# Altium PCB FMC-320U-A1.PcbDoc (part 2 of 2)
Units mm, origin at the board's own origin, x right, y up, seen from the top; angles counter-clockwise.
Board outline 106 x 84 mm, 2 copper layers (Top Layer, Bottom Layer), stack 1.672 mm thick; 77 components, 125 nets, 413 pads, 171 vias.
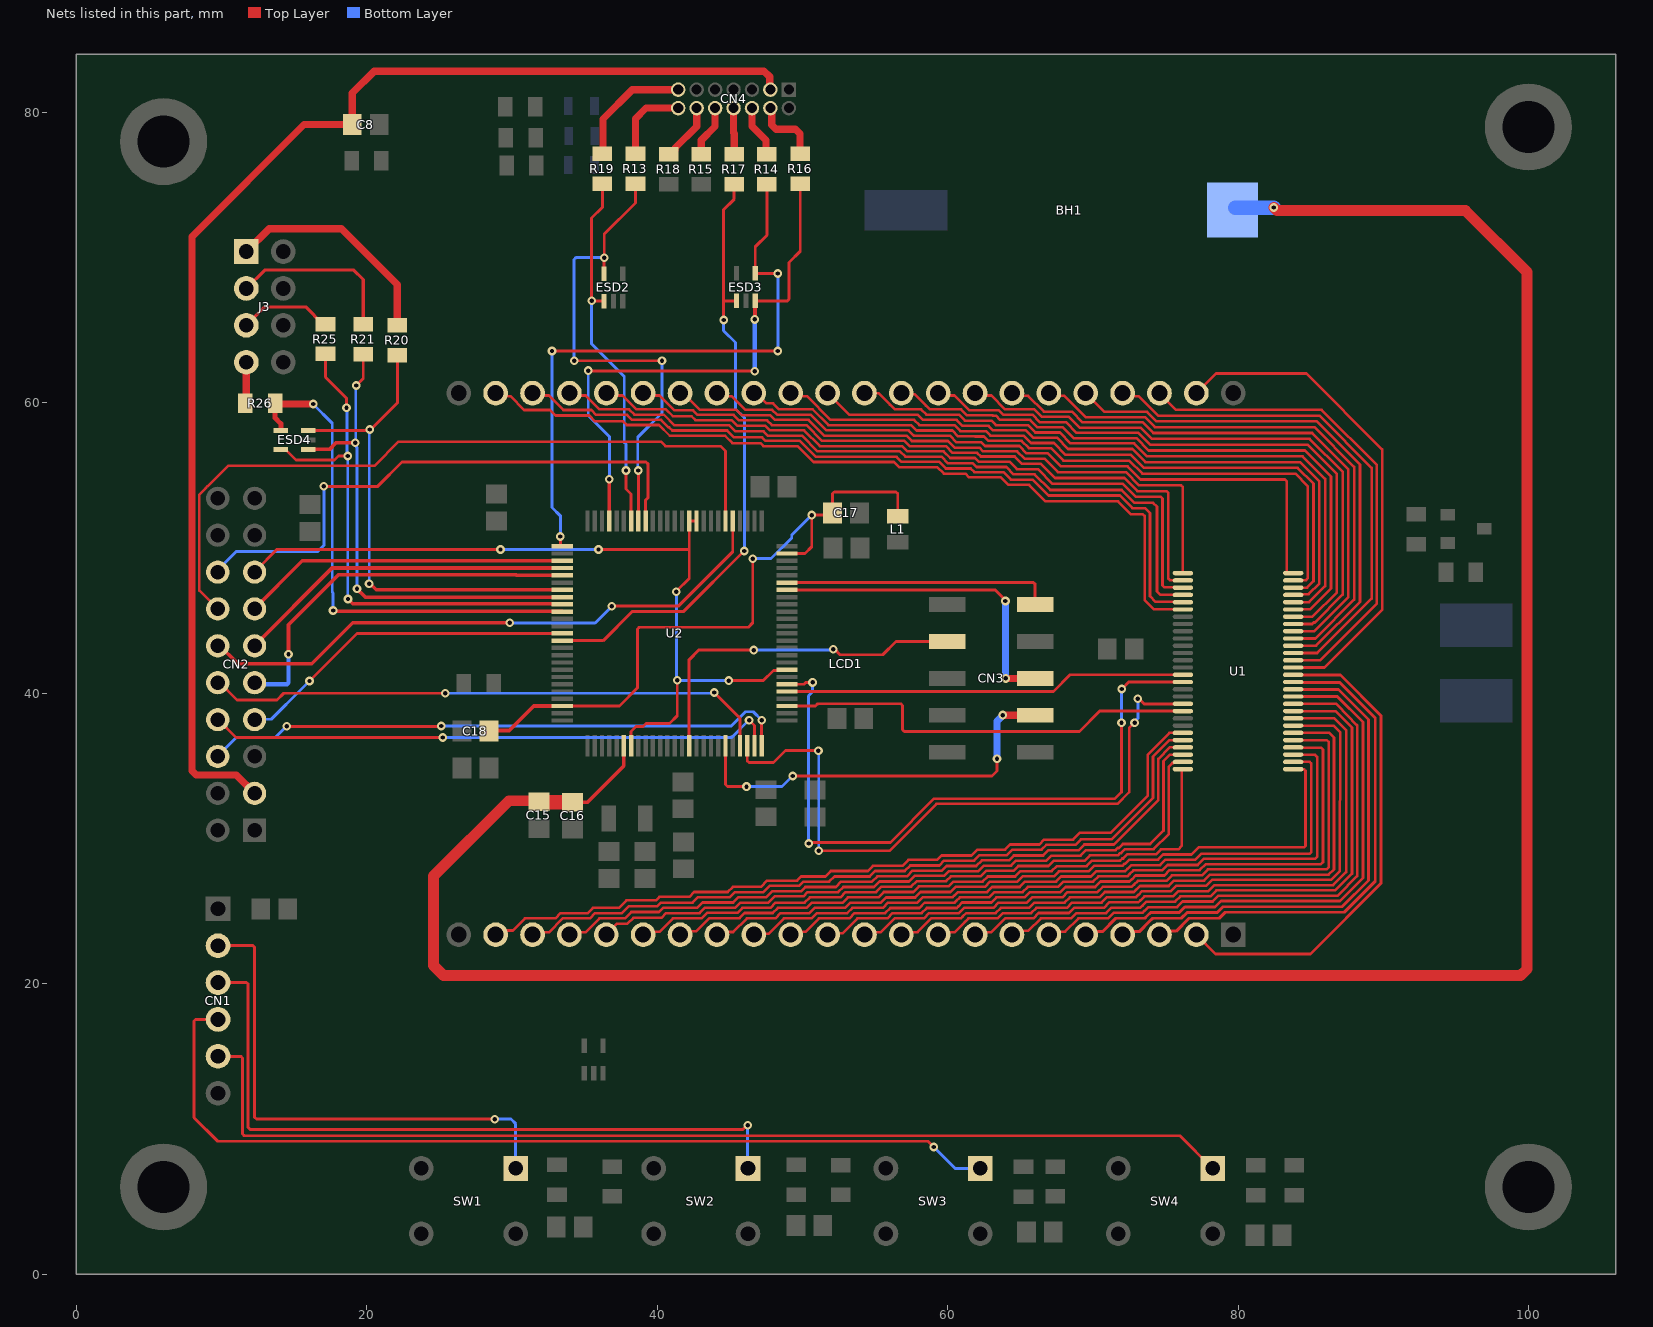
[diagram p2: the nets of this part, all layers, seen from the top]

## Via types
v1: diameter 0.6, hole 0.3, Top Layer to Bottom Layer, 166 vias
v2: diameter 0.6, hole 0.3, Top Layer to Bottom Layer, tented both sides, 3 vias
v3: diameter 1.27, hole 0.711, Top Layer to Bottom Layer, 2 vias

## Nets (pads, with @x,y where several pads share a name; then routed paths per layer and width w, separated by ;. In a path a pad name is that pad's centre, name@x,y a point inside that pad or via, vN(x,y) a via of type N, cw(c..) or ccw(c..) an arc to the next point about the centre after c; other vN are vias at no path point) (continued)
PA0: CN2.10 U2.22 | length 39.4
  Top Layer w0.2: CN2.10@9.73,40.883 11.063,39.55 13.814,39.55 14.271,40.007 v1(25.396,40.007) ; v1(43.925,40.053) 45.7,38.278 U2.22@45.7,36.39
  Bottom Layer w0.2: v1(25.396,40.007) 43.88,40.007 v1(43.925,40.053)
PA8: CN2.16 U2.67 | length 39.1
  Top Layer w0.2: v1(17.04,54.257) 20.756,54.257 22.43,55.93 39.233,55.93 39.35,55.813 39.35,53.453 39.2,53.303 U2.67@39.2,51.866
  Bottom Layer w0.2: CN2.16@9.73,48.503 11.005,49.778 16.618,49.778 17.04,50.2 v1(17.04,54.257)
PAD_DOWN: CN1.5 SW4.1 | length 74.8
  Top Layer w0.2: CN1.5@9.75,15 11.328,15 11.445,14.883 11.445,9.647 11.562,9.53 75.998,9.53 SW4.1@78.25,7.278
PAD_ENTER: CN1.3 SW2.1 | length 49.5
  Top Layer w0.2: CN1.3@9.75,20.08 11.708,20.08 11.825,19.963 11.825,10.09 11.942,9.973 45.908,9.973 46.187,10.253 v1(46.225,10.253)
  Bottom Layer w0.2: v1(46.225,10.253) 46.225,7.303 SW2.1@46.25,7.278
PAD_ESC: CN1.2 SW1.1 | length 35.5
  Top Layer w0.2: CN1.2@9.75,22.62 12.158,22.62 12.275,22.503 12.275,10.792 12.392,10.675 v1(28.8,10.675)
  Bottom Layer w0.2: v1(28.8,10.675) 29.925,10.675 30.25,10.35 SW1.1@30.25,7.278
PAD_UP: CN1.4 SW3.1 | length 63.9
  Top Layer w0.2: CN1.4@9.75,17.54 8.217,17.54 8.1,17.423 8.1,10.775 9.725,9.15 58.653,9.15 v1(59.05,8.753)
  Bottom Layer w0.2: v1(59.05,8.753) 60.525,7.278 SW3.1@62.25,7.278
PB10: CN3.5 U2.44 | length 23
  Top Layer w0.2: U2.44@48.938,47.128 63.259,47.128 63.979,46.408 v1(63.979,46.357) ; CN3.5@65.464,41.028 65.664,41.228 65.944,40.947 CN3.5@66.025,41.028
  Top Layer w0.5: v1(64,41.028) CN3.5@65.464,41.028
  Bottom Layer w0.2: v1@63.979,41.049 v1(64,41.028)
  Bottom Layer w0.5: v1@63.979,41.049 v1(63.979,46.357)
PB11: CN3.9 U2.45 | length 18.5
  Top Layer w0.22: U2.45@48.938,47.628 56.605,47.628 56.613,47.635 65.908,47.635 66.025,47.517 CN3.9@66.025,46.108
PCF8553_CE: U1.20 U2.28 | length 29.7
  Top Layer w0.2: U2.28@48.938,39.128 50.9,39.128 51.055,39.283 56.783,39.283 56.9,39.165 56.9,37.495 57.017,37.378 69.075,37.378 70.475,38.778 U1.20@76.2,38.778
PCF8553_RESET: U1.15 U2.30 | length 27.7
  Top Layer w0.2: U2.30@48.938,40.128 67.281,40.128 68.431,41.278 U1.15@76.2,41.278
PCF8553_SCL: U1.19 U2.23 | length 46.2
  Top Layer w0.18: v1(51.125,29.153) 55.994,29.153 59.224,32.382 71.695,32.382 72.5,33.187 72.5,37.603 v1(72.875,37.978)
  Top Layer w0.2: U2.23@46.2,36.39 46.2,35.345 46.317,35.228 48.001,35.228 48.826,36.053 v1(51.1,36.053) ; v1(73.1,39.628) 73.178,39.628 73.528,39.278 U1.19@76.2,39.278
  Bottom Layer w0.2: v1(51.1,36.053) 51.125,36.028 v1(51.125,29.153) ; v1(72.875,37.978) 72.875,38.034 73.1,38.259 v1(73.1,39.628)
PCF8553_SDIO: U1.16 U2.31 | length 47.6
  Top Layer w0.18: v1(50.425,29.653) 50.495,29.723 56.055,29.723 59.075,32.742 65.972,32.742 65.973,32.743 71.523,32.743 71.975,33.195 v1(71.975,37.978)
  Top Layer w0.2: U2.31@48.938,40.628 50.1,40.628 50.225,40.753 v1(50.7,40.753) ; v1(72,40.303) 72.475,40.778 U1.16@76.2,40.778
  Bottom Layer w0.2: v1(50.425,29.653) 50.425,39.828 50.7,40.103 v1(50.7,40.753) ; v1(71.975,37.978) 71.975,40.278 v1(72,40.303)
PD1: ESD4.3 R20.2 U2.82 | length 34.3
  Top Layer w0.2: ESD4.3@15.975,58.1 20.125,58.1 v1(20.2,58.175) 20.275,58.175 22.1,60 R20.2@22.1,63.298
  Top Layer w0.25: v1(20.155,47.55) 20.22,47.55 20.642,47.128 U2.82@33.462,47.128
  Bottom Layer w0.2: v1(20.155,47.55) 20.162,47.557 20.162,58.137 v1(20.2,58.175)
PD1_EXT: J3.1 R20.1 | length 15.4
  Top Layer w0.5: J3.1@11.7,70.425 13.275,72 18.25,72 22.1,68.15 R20.1@22.1,65.352
PD2: ESD4.1 R21.2 U2.83 | length 34.2
  Top Layer w0.2: v1(19.275,61.2) 19.75,61.675 R21.2@19.75,63.35
  Top Layer w0.25: ESD4.1@15.975,56.8 17.425,56.8 17.875,57.25 v1(19.2,57.25) ; v1(19.325,47.2) 19.325,47.187 19.884,46.628 U2.83@33.462,46.628
  Bottom Layer w0.2: v1(19.275,61.2) 19.238,61.162 19.238,57.288 v1(19.2,57.25) 19.277,57.173 19.277,56.981 19.325,56.933 v1(19.325,47.2)
PD2_EXT: J3.3 R21.1 | length 11.9
  Top Layer w0.22: J3.3@11.7,67.885 12.965,69.15 19.1,69.15 19.75,68.5 R21.1@19.75,65.404
PD3: ESD4.5 R25.2 U2.84 | length 37.4
  Top Layer w0.2: ESD4.5@14.075,56.8 14.4,56.8 15.125,56.075 17.775,56.075 18.05,56.35 v1(18.675,56.35) ; R25.2@17.15,63.375 17.15,61.775 18.6,60.325 v2(18.6,59.675)
  Top Layer w0.25: v1(18.7,46.5) 19.027,46.173 32.706,46.173 32.726,46.153 33.437,46.153 U2.84@33.462,46.128
  Bottom Layer w0.2: v2(18.6,59.675) 18.62,59.655 18.62,56.405 v1(18.675,56.35) 18.688,56.337 18.688,46.513 v1(18.7,46.5)
PD3_EXT: J3.5 R25.1 | length 6.5
  Top Layer w0.22: J3.5@11.7,65.345 12.97,66.615 15.789,66.615 16.975,65.429 R25.1@17.15,65.429
PD4: ESD4.4 R26.2 U2.85 | length 35.3
  Top Layer w0.25: v1(17.675,45.7) 17.722,45.653 33.437,45.653 U2.85@33.462,45.628
  Top Layer w0.35: R26.2@13.725,59.925 R26.2@13.675,59.975 13.675,58.975 14.075,58.575 ESD4.4@14.075,58.1
  Top Layer w0.5: R26.2@13.725,59.925 v1(16.3,59.925)
  Bottom Layer w0.2: v1(16.3,59.925) 17.62,58.605 17.62,46.977 17.675,46.922 v1(17.675,45.7)
PD4_EXT: J3.7 R26.1 | length 2.9
  Top Layer w0.2: R26.1@11.621,59.975 R26.1@11.7,60.054
  Top Layer w0.5: R26.1@11.7,60.054 J3.7@11.7,62.805
PD7: CN2.7 U2.88 | length 23.6
  Top Layer w0.2: v1(16.049,40.845) 19.331,44.128 U2.88@33.462,44.128
  Bottom Layer w0.2: CN2.7@12.27,38.218 13.414,38.218 15.524,40.328 15.531,40.328 v1(16.049,40.845)
PULSE_OUT_CMP: CN2.15 U2.7 U2.33 U2.60 U2.61 | length 57.3
  Top Layer w0.2: CN2.15@12.27,48.503 12.395,48.503 13.795,49.903 v1(29.2,49.903) ; v1(35.95,49.903) 42.15,49.903 42.201,49.954 ; U2.7@38.2,36.39 38.2,37.378 38.545,37.723 39.026,37.723 39.231,37.928 40.85,37.928 41.375,38.453 v1(41.375,40.903) ; v1(41.3,47.003) 42.201,47.904 42.201,49.903 42.201,51.865 U2.61@42.2,51.866 ; U2.61@42.25,51.866 U2.60@42.7,51.866 ; v1(44.925,40.878) 47.3,40.878 48,41.578 48.888,41.578 U2.33@48.938,41.628
  Bottom Layer w0.2: v1(29.2,49.903) v1(35.95,49.903) ; v1(41.3,47.003) 41.338,46.965 41.338,40.94 41.387,40.89 44.912,40.89 v1(44.925,40.878)
RTD_IN: CN3.8 U2.15 | length 24.6
  Top Layer w0.2: U2.15@42.2,36.39 42.2,42.318 42.859,42.978 v1(46.65,42.978) ; v1(52.117,43.03) 52.221,43.03 52.593,42.658 55.529,42.658 56.439,43.568 CN3.8@60,43.568
  Bottom Layer w0.2: v1(46.65,42.978) 52.065,42.978 v1(52.117,43.03)
SEG0: LCD1.21 U1.23 | length 54.7
  Top Layer w0.18: LCD1.21@28.87,23.378 29.161,23.668 30.063,23.668 30.892,24.498 32.977,24.498 33.337,24.858 35.216,24.858 35.578,25.22 37.361,25.22 37.88,25.739 39.904,25.739 40.152,25.986 42.211,25.986 42.541,26.317 44.854,26.317 45.205,26.668 47.134,26.668 47.566,27.1 49.625,27.1 49.908,27.383 51.584,27.383 51.96,27.76 54.501,27.76 54.861,28.12 56.893,28.12 57.3,28.526 59.28,28.526 59.585,28.831 61.643,28.831 62.05,29.238 63.955,29.238 64.306,29.589 66.312,29.589 66.643,29.919 68.644,29.919 69.131,30.406 71.242,30.406 73.788,32.952 73.788,35.782 75.283,37.278 U1.23@76.2,37.278
SEG1: LCD1.20 U1.24 | length 52
  Top Layer w0.18: LCD1.20@31.41,23.378 31.574,23.542 32.53,23.542 33.486,24.498 35.365,24.498 35.727,24.86 37.567,24.86 38.045,25.339 40.013,25.339 40.254,25.58 42.44,25.58 42.816,25.957 45.003,25.957 45.354,26.308 47.308,26.308 47.739,26.74 49.774,26.74 50.057,27.023 51.845,27.023 52.205,27.383 54.634,27.383 55.01,27.76 57.042,27.76 57.428,28.145 59.432,28.145 59.758,28.471 61.815,28.471 62.201,28.857 64.083,28.857 64.455,29.229 66.461,29.229 66.792,29.559 68.793,29.559 69.183,29.949 71.294,29.949 74.148,32.802 74.148,35.633 75.292,36.778 U1.24@76.2,36.778
SEG2: LCD1.19 U1.25 | length 49.3
  Top Layer w0.18: LCD1.19@33.95,23.378 34.114,23.542 35.07,23.542 36.026,24.498 37.77,24.498 38.211,24.939 40.122,24.939 40.404,25.22 42.74,25.22 43.117,25.597 45.225,25.597 45.576,25.948 47.506,25.948 47.938,26.38 49.923,26.38 50.207,26.663 52.311,26.663 52.671,27.023 54.783,27.023 55.16,27.4 57.192,27.4 57.577,27.785 59.606,27.785 59.931,28.111 61.965,28.111 62.35,28.497 64.232,28.497 64.566,28.831 66.573,28.831 66.925,29.183 69.016,29.183 69.422,29.589 71.443,29.589 74.508,32.653 74.508,35.484 75.297,36.273 76.195,36.273 U1.25@76.2,36.278
SEG3: LCD1.18 U1.26 | length 47.6
  Top Layer w0.18: LCD1.18@36.49,23.378 37.245,24.132 37.944,24.132 38.35,24.539 40.281,24.539 40.602,24.86 42.913,24.86 43.29,25.237 45.374,25.237 45.725,25.588 47.656,25.588 48.087,26.02 50.072,26.02 50.356,26.303 52.461,26.303 52.821,26.663 54.932,26.663 55.309,27.04 57.341,27.04 57.726,27.425 59.755,27.425 60.081,27.751 62.114,27.751 62.499,28.137 64.381,28.137 64.715,28.471 66.794,28.471 67.146,28.823 69.165,28.823 69.539,29.198 71.561,29.198 71.71,29.347 71.791,29.347 72.071,29.626 73.946,29.626 74.868,30.548 74.868,35.335 75.311,35.778 U1.26@76.2,35.778
SEG4: LCD1.17 U1.27 | length 44.8
  Top Layer w0.18: LCD1.17@39.03,23.378 39.231,23.579 40.15,23.579 41.071,24.5 43.063,24.5 43.439,24.877 45.523,24.877 45.874,25.228 47.805,25.228 48.157,25.58 50.141,25.58 50.505,25.943 52.61,25.943 52.97,26.303 55.081,26.303 55.458,26.68 57.49,26.68 57.875,27.065 59.904,27.065 60.23,27.391 62.263,27.391 62.648,27.777 64.53,27.777 64.865,28.111 66.943,28.111 67.295,28.463 69.414,28.463 69.788,28.838 71.732,28.838 71.882,28.987 71.94,28.987 72.22,29.266 74.191,29.266 75.24,30.315 75.24,34.594 75.23,34.604 75.23,34.952 75.476,35.198 75.538,35.198 75.618,35.278 U1.27@76.2,35.278
SEG5: LCD1.16 U1.28 | length 42.4
  Top Layer w0.18: LCD1.16@41.57,23.378 41.811,23.618 42.69,23.618 43.588,24.517 45.672,24.517 46.023,24.868 47.954,24.868 48.306,25.22 50.29,25.22 50.65,25.58 52.777,25.58 53.141,25.943 55.23,25.943 55.603,26.317 57.635,26.317 58.024,26.705 60.075,26.705 60.401,27.031 62.412,27.031 62.764,27.383 64.646,27.383 65.014,27.751 67.166,27.751 67.518,28.103 69.563,28.103 69.938,28.478 71.881,28.478 72.031,28.627 72.09,28.627 72.369,28.906 74.34,28.906 74.692,29.259 75.883,29.259 76.12,29.495 76.12,34.722 76.145,34.722 U1.28@76.2,34.778
SEG6: LCD1.15 U1.29 | length 49.1
  Top Layer w0.18: LCD1.15@44.11,23.378 44.298,23.565 45.23,23.565 46.172,24.508 48.149,24.508 48.501,24.86 50.48,24.86 50.84,25.22 52.937,25.22 53.3,25.583 55.397,25.583 55.751,25.938 57.766,25.938 58.145,26.317 60.19,26.317 60.288,26.414 60.293,26.414 60.55,26.671 62.561,26.671 62.913,27.023 64.795,27.023 65.163,27.391 67.315,27.391 67.667,27.743 69.712,27.743 70.087,28.118 72.03,28.118 72.18,28.267 72.239,28.267 72.518,28.546 74.489,28.546 74.841,28.899 76.797,28.899 77.288,29.39 84.545,29.39 84.65,29.495 84.65,34.66 84.552,34.758 83.819,34.758 U1.29@83.8,34.778
SEG7: LCD1.14 U1.30 | length 48.2
  Top Layer w0.18: LCD1.14@46.65,23.378 46.711,23.439 47.665,23.439 48.726,24.5 50.629,24.5 50.989,24.86 53.086,24.86 53.45,25.223 55.546,25.223 55.9,25.578 57.915,25.578 58.294,25.957 60.34,25.957 60.437,26.054 60.442,26.054 60.699,26.311 62.71,26.311 63.062,26.663 64.961,26.663 65.325,27.028 67.461,27.028 67.816,27.383 69.862,27.383 70.236,27.758 72.227,27.758 72.376,27.907 72.388,27.907 72.652,28.171 74.623,28.171 74.99,28.539 77.064,28.539 77.479,28.954 84.94,28.954 85.05,29.064 85.05,35.16 84.933,35.278 U1.30@83.8,35.278
SEG8: LCD1.13 U1.31 | length 47.1
  Top Layer w0.18: LCD1.13@49.19,23.378 49.378,23.566 50.205,23.566 51.139,24.5 53.235,24.5 53.599,24.863 55.695,24.863 56.049,25.218 58.064,25.218 58.424,25.578 60.47,25.578 60.586,25.694 60.591,25.694 60.848,25.951 62.859,25.951 63.211,26.303 65.159,26.303 65.524,26.668 67.61,26.668 67.966,27.023 70.011,27.023 70.385,27.398 72.376,27.398 72.526,27.547 72.537,27.547 72.801,27.811 74.772,27.811 75.139,28.179 77.213,28.179 77.628,28.594 85.31,28.594 85.45,28.733 85.45,35.616 85.308,35.758 83.819,35.758 U1.31@83.8,35.778
SEG9: LCD1.12 U1.32 | length 46
  Top Layer w0.18: LCD1.12@51.73,23.378 51.817,23.464 52.745,23.464 53.784,24.503 55.844,24.503 56.199,24.858 58.213,24.858 58.573,25.218 60.619,25.218 60.735,25.334 60.74,25.334 60.997,25.591 63.008,25.591 63.361,25.943 65.309,25.943 65.673,26.308 67.759,26.308 68.115,26.663 70.16,26.663 70.534,27.038 72.525,27.038 72.675,27.187 72.686,27.187 72.95,27.451 74.921,27.451 75.289,27.819 77.362,27.819 77.777,28.234 85.706,28.234 85.85,28.378 85.85,36.116 85.708,36.258 83.819,36.258 U1.32@83.8,36.278
SEG10: LCD1.11 U1.33 | length 45
  Top Layer w0.18: LCD1.11@54.27,23.378 54.434,23.542 55.39,23.542 56.065,24.216 56.066,24.216 56.348,24.498 58.362,24.498 58.722,24.858 60.768,24.858 60.884,24.974 60.889,24.974 61.14,25.224 63.151,25.224 63.51,25.583 65.458,25.583 65.822,25.948 67.908,25.948 68.264,26.303 70.309,26.303 70.683,26.678 72.674,26.678 72.824,26.827 72.835,26.827 73.099,27.091 75.07,27.091 75.438,27.459 77.511,27.459 77.927,27.874 86.102,27.874 86.25,28.022 86.25,36.635 86.108,36.778 U1.33@83.8,36.778
SEG11: LCD1.10 U1.34 | length 43.7
  Top Layer w0.18: LCD1.10@56.81,23.378 56.989,23.556 57.93,23.556 58.871,24.498 60.917,24.498 61.033,24.614 61.038,24.614 61.282,24.858 63.293,24.858 63.659,25.223 65.607,25.223 65.971,25.588 68.057,25.588 68.413,25.943 70.458,25.943 70.832,26.318 72.823,26.318 72.973,26.467 72.984,26.467 73.248,26.731 75.219,26.731 75.587,27.099 77.661,27.099 78.072,27.51 86.247,27.51 86.61,27.873 86.61,36.961 86.294,37.278 U1.34@83.8,37.278
SEG12: LCD1.9 U1.35 | length 42.5
  Top Layer w0.18: LCD1.9@59.35,23.378 59.514,23.542 60.47,23.542 61.182,24.254 61.187,24.254 61.431,24.498 63.442,24.498 63.808,24.863 65.756,24.863 66.12,25.228 68.206,25.228 68.562,25.583 70.607,25.583 70.981,25.958 72.973,25.958 73.122,26.107 73.133,26.107 73.397,26.371 75.368,26.371 75.736,26.739 77.81,26.739 78.221,27.15 86.396,27.15 87.01,27.764 87.01,28.078 87.05,37.152 87.05,37.301 86.997,37.354 86.574,37.778 U1.35@83.8,37.778
SEG13: LCD1.8 U1.36 | length 41.1
  Top Layer w0.18: LCD1.8@61.89,23.378 62.069,23.556 63.01,23.556 63.957,24.503 65.905,24.503 66.269,24.868 68.356,24.868 68.711,25.223 70.756,25.223 71.13,25.598 73.122,25.598 73.271,25.747 73.282,25.747 73.546,26.011 75.517,26.011 75.885,26.379 77.959,26.379 78.371,26.79 86.546,26.79 87.45,27.695 87.45,37.318 87.45,37.467 87.397,37.52 86.639,38.278 U1.36@83.8,38.278
SEG14: LCD1.7 U1.37 | length 39.7
  Top Layer w0.18: LCD1.7@64.43,23.378 64.692,23.639 65.55,23.639 66.418,24.508 68.505,24.508 68.86,24.863 70.905,24.863 71.28,25.238 73.271,25.238 73.42,25.387 73.432,25.387 73.695,25.651 75.666,25.651 76.034,26.019 78.108,26.019 78.52,26.43 86.695,26.43 87.85,27.586 87.85,37.632 86.705,38.778 U1.37@83.8,38.778
SEG15: LCD1.6 U1.38 | length 38.3
  Top Layer w0.18: LCD1.6@66.97,23.378 67.176,23.584 68.09,23.584 69.009,24.503 71.054,24.503 71.429,24.878 73.42,24.878 73.569,25.027 73.581,25.027 73.829,25.275 75.8,25.275 76.183,25.659 78.257,25.659 78.669,26.07 86.87,26.07 88.21,27.41 88.21,37.782 88.16,37.834 86.876,39.172 86.771,39.278 U1.38@83.8,39.278
SEG16: LCD1.5 U1.39 | length 37
  Top Layer w0.2: LCD1.5@69.51,23.378 69.718,23.586 70.66,23.586 71.582,24.508 73.573,24.508 73.723,24.657 73.734,24.657 73.982,24.905 75.953,24.905 76.337,25.289 78.41,25.289 78.822,25.7 87.023,25.7 88.597,27.274 88.597,38.017 86.836,39.778 U1.39@83.8,39.778
SEG17: LCD1.4 U1.40 | length 35.6
  Top Layer w0.2: LCD1.4@72.05,23.378 72.057,23.37 72.273,23.586 73.2,23.586 73.891,24.277 74.122,24.508 76.093,24.508 76.48,24.894 78.553,24.894 78.96,25.301 87.161,25.301 88.977,27.117 88.977,38.202 86.921,40.258 83.819,40.258 U1.40@83.8,40.278
SEG18: LCD1.3 U1.41 | length 34.3
  Top Layer w0.2: LCD1.3@74.59,23.378 74.83,23.617 75.74,23.617 76.629,24.506 77.076,24.506 cw(c77.13,23.378) 77.184,24.506 78.703,24.506 79.116,24.92 87.317,24.92 89.45,27.052 89.45,38.295 86.987,40.758 83.819,40.758 U1.41@83.8,40.778
SEG19: LCD1.2 U1.42 | length 34
  Top Layer w0.2: LCD1.2@77.13,23.378 78.458,22.049 84.985,22.049 89.85,26.915 89.85,38.461 87.052,41.258 83.819,41.258 U1.42@83.8,41.278
SEG20: LCD1.43 U1.43 | length 34.3
  Top Layer w0.18: LCD1.43@77.13,60.678 78.48,62.028 84.7,62.028 89.92,56.808 89.92,45.748 85.95,41.778 U1.43@83.8,41.778
SEG21: LCD1.42 U1.44 | length 33.9
  Top Layer w0.18: LCD1.42@74.59,60.678 75.74,59.528 85.766,59.528 89.56,55.733 89.56,46.188 85.65,42.278 U1.44@83.8,42.278
SEG22: LCD1.41 U1.45 | length 35.2
  Top Layer w0.18: LCD1.41@72.05,60.678 72.274,60.454 73.17,60.454 74.496,59.128 85.6,59.128 89.2,55.528 89.2,46.528 85.45,42.778 U1.45@83.8,42.778
SEG23: LCD1.40 U1.46 | length 36.2
  Top Layer w0.18: LCD1.40@69.51,60.678 70.8,59.387 73.727,59.387 74.387,58.728 85.434,58.728 88.4,55.762 88.4,46.293 85.384,43.278 U1.46@83.8,43.278
SEG24: LCD1.39 U1.47 | length 37.6
  Top Layer w0.18: LCD1.39@66.97,60.678 67.149,60.499 68.02,60.499 69.501,59.017 73.588,59.017 74.278,58.328 85.269,58.328 88,55.596 88,46.459 85.319,43.778 U1.47@83.8,43.778
SEG25: LCD1.38 U1.48 | length 38.9
  Top Layer w0.18: LCD1.38@64.43,60.678 64.614,60.493 65.55,60.493 66.641,59.403 68.55,59.403 69.296,58.657 73.439,58.657 74.169,57.928 85.103,57.928 87.6,55.431 87.6,46.625 85.253,44.278 U1.48@83.8,44.278
SEG26: LCD1.37 U1.49 | length 40.3
  Top Layer w0.18: LCD1.37@61.89,60.678 62.054,60.514 63.01,60.514 63.966,59.558 65.977,59.558 66.492,59.043 68.345,59.043 69.09,58.297 73.29,58.297 74.06,57.528 84.937,57.528 87.2,55.265 87.2,46.79 85.287,44.878 85.2,44.878 85.1,44.778 U1.49@83.8,44.778
SEG27: LCD1.36 U1.50 | length 41.6
  Top Layer w0.18: LCD1.36@59.35,60.678 59.514,60.514 60.47,60.514 61.485,59.499 63.238,59.499 63.248,59.489 63.526,59.489 63.822,59.193 65.832,59.193 66.342,58.683 68.139,58.683 68.884,57.937 73.141,57.937 73.95,57.128 84.772,57.128 86.8,55.099 86.8,46.956 85.122,45.278 U1.50@83.8,45.278
SEG28: LCD1.35 U1.51 | length 42.9
  Top Layer w0.18: LCD1.35@56.81,60.678 56.903,60.585 57.743,60.585 58.513,59.814 58.77,59.558 60.917,59.558 61.336,59.139 63.089,59.139 63.099,59.129 63.323,59.129 63.619,58.833 65.683,58.833 66.193,58.323 67.933,58.323 68.679,57.577 72.991,57.577 73.841,56.728 84.606,56.728 86.4,54.934 86.4,47.228 84.95,45.778 U1.51@83.8,45.778
SEG29: LCD1.34 U1.52 | length 44.2
  Top Layer w0.18: LCD1.34@54.27,60.678 55.246,60.678 55.902,60.022 ccw(c56.81,60.678) 56.155,59.769 56.366,59.558 58.17,59.558 58.53,59.198 60.768,59.198 61.187,58.779 63.008,58.779 63.314,58.473 65.534,58.473 66.044,57.963 67.728,57.963 68.473,57.217 72.842,57.217 73.732,56.328 84.44,56.328 86,54.768 86,47.393 84.884,46.278 U1.52@83.8,46.278
SEG30: LCD1.33 U1.53 | length 45.1
  Top Layer w0.18: LCD1.33@51.73,60.678 53.218,59.19 57.938,59.19 58.29,58.838 60.619,58.838 61.038,58.419 62.814,58.419 63.122,58.111 65.387,58.111 65.895,57.603 67.522,57.603 68.297,56.828 72.723,56.828 73.623,55.928 84.275,55.928 85.6,54.602 85.6,47.559 84.869,46.828 U1.53@84.2,46.828
SEG31: LCD1.32 U1.54 | length 46.9
  Top Layer w0.18: LCD1.32@49.19,60.678 49.401,60.467 50.31,60.467 51.947,58.83 57.698,58.83 58.055,58.473 60.457,58.473 60.871,58.059 62.642,58.059 62.95,57.751 65.238,57.751 65.746,57.243 67.316,57.243 68.131,56.428 72.614,56.428 73.514,55.528 84.109,55.528 85.2,54.436 85.2,47.725 84.753,47.278 U1.54@83.8,47.278
SEG32: LCD1.31 U1.55 | length 48.2
  Top Layer w0.18: LCD1.31@46.65,60.678 46.823,60.678 47.528,59.972 47.978,59.972 48.393,59.558 50.71,59.558 51.798,58.47 57.492,58.47 57.86,58.102 60.319,58.102 60.722,57.699 60.921,57.699 60.923,57.699 60.924,57.699 61.893,57.686 62.506,57.686 62.558,57.633 62.801,57.391 65.089,57.391 65.597,56.883 67.111,56.883 67.966,56.028 72.505,56.028 73.405,55.128 83.943,55.128 84.8,54.271 84.8,47.914 84.683,47.797 83.819,47.797 U1.55@83.8,47.778
SEG33: LCD1.30 U1.56 | length 48.5
  Top Layer w0.18: LCD1.30@44.11,60.678 44.323,60.465 45.121,60.465 46.063,59.523 47.918,59.523 48.252,59.19 50.569,59.19 51.649,58.11 57.311,58.11 57.659,57.761 57.679,57.742 60.17,57.742 60.627,57.285 62.328,57.285 62.582,57.031 64.94,57.031 65.448,56.523 66.905,56.523 67.8,55.628 72.396,55.628 73.296,54.728 83.233,54.728 83.35,54.61 83.35,48.324 83.396,48.278 U1.56@83.8,48.278
SEG34: LCD1.29 U1.1 | length 43.2
  Top Layer w0.18: LCD1.29@41.57,60.678 41.786,60.678 42.923,59.54 45.437,59.54 45.813,59.163 47.769,59.163 48.103,58.83 50.42,58.83 51.5,57.75 57.162,57.75 57.53,57.382 60.021,57.382 60.478,56.925 62.179,56.925 62.433,56.671 64.791,56.671 65.299,56.163 66.665,56.163 67.6,55.228 72.287,55.228 73.187,54.328 76.083,54.328 76.2,54.21 U1.1@76.2,48.278
SEG35: LCD1.28 U1.2 | length 46
  Top Layer w0.18: LCD1.28@39.03,60.678 39.194,60.514 40.15,60.514 41.175,59.489 42.465,59.489 42.774,59.18 45.263,59.18 45.64,58.803 47.57,58.803 47.904,58.47 50.271,58.47 51.351,57.39 57.013,57.39 57.38,57.022 59.872,57.022 60.329,56.565 62.03,56.565 62.284,56.311 64.617,56.311 65.125,55.803 66.425,55.803 67.4,54.828 72.177,54.828 73.077,53.928 75.083,53.928 75.2,53.81 75.2,47.902 75.305,47.797 76.181,47.797 U1.2@76.2,47.778
SEG36: LCD1.27 U1.3 | length 48.8
  Top Layer w0.18: LCD1.27@36.49,60.678 36.654,60.514 37.61,60.514 38.566,59.558 40.597,59.558 41.072,59.083 42.362,59.083 42.625,58.82 45.114,58.82 45.512,58.422 47.442,58.422 47.755,58.11 50.122,58.11 51.202,57.03 56.864,57.03 57.231,56.662 59.723,56.662 60.18,56.205 61.881,56.205 62.135,55.951 64.266,55.951 64.774,55.443 66.219,55.443 67.234,54.428 72.068,54.428 72.968,53.528 74.683,53.528 74.8,53.41 74.8,47.423 74.923,47.301 76.177,47.301 U1.3@76.2,47.278
SEG37: LCD1.26 U1.4 | length 51.4
  Top Layer w0.18: LCD1.26@33.95,60.678 34.114,60.514 35.07,60.514 36.026,59.558 38.057,59.558 38.07,59.544 38.417,59.198 40.448,59.198 41.186,58.46 44.965,58.46 45.384,58.041 47.314,58.041 47.606,57.75 49.972,57.75 51.052,56.67 56.714,56.67 57.082,56.302 59.574,56.302 60.031,55.845 61.732,55.845 61.986,55.591 64.042,55.591 64.55,55.083 65.999,55.083 67.079,54.003 71.984,54.003 72.869,53.118 74.16,53.118 74.418,52.86 74.418,47.018 74.635,46.801 76.177,46.801 U1.4@76.2,46.778
SEG38: LCD1.25 U1.5 | length 54.1
  Top Layer w0.18: LCD1.25@31.41,60.678 31.574,60.514 32.53,60.514 33.529,59.514 35.456,59.514 35.786,59.184 37.921,59.184 38.268,58.838 40.273,58.838 40.79,58.321 40.816,58.321 41.037,58.1 44.816,58.1 45.281,57.635 47.211,57.635 47.457,57.39 49.823,57.39 50.92,56.293 56.481,56.293 56.833,55.942 59.425,55.942 59.882,55.485 61.582,55.485 61.836,55.231 63.843,55.231 64.351,54.723 65.85,54.723 66.951,53.622 71.856,53.622 72.72,52.758 73.58,52.758 73.936,52.402 73.936,46.687 74.322,46.301 76.177,46.301 U1.5@76.2,46.278
SEG39: LCD1.24 U1.6 | length 56.9
  Top Layer w0.18: LCD1.24@28.87,60.678 29.083,60.465 29.881,60.465 30.832,59.514 32.61,59.514 32.991,59.133 35.328,59.133 35.73,58.731 37.646,58.731 37.9,58.478 40.124,58.478 40.861,57.74 44.667,57.74 45.178,57.228 47.109,57.228 47.308,57.03 49.674,57.03 50.771,55.933 56.309,55.933 56.66,55.582 59.275,55.582 59.733,55.125 61.231,55.125 61.485,54.871 63.671,54.871 64.179,54.363 65.602,54.363 66.737,53.228 71.741,53.228 72.641,52.328 73.445,52.328 73.563,52.21 73.563,46.424 74.209,45.778 U1.6@76.2,45.778
SPI3_MISO: CN2.11 U2.79 | length 23.4
  Top Layer w0.25: CN2.11@12.27,43.298 17.6,48.628 U2.79@33.462,48.628
SPI3_MOSI: CN2.9 U2.80 | length 26.8
  Top Layer w0.25: v1(14.601,42.7) 14.601,44.729 18.027,48.155 30.268,48.155 30.295,48.128 U2.80@33.462,48.128
  Bottom Layer w0.3: CN2.9@12.27,40.758 12.409,40.896 12.688,40.617 14.496,40.617 14.601,40.722 v1(14.601,42.7)
SPI3_SCK: CN2.13 U2.78 | length 22.6
  Top Layer w0.25: CN2.13@12.27,45.838 15.56,49.128 U2.78@33.462,49.128
SWCLK: ESD3.4 R14.2 U2.76 | length 42.8
  Top Layer w0.2: v1(32.75,63.578) v1(48.306,63.578) ; v1(33.325,50.803) 33.325,50.178 33.375,50.128 U2.76@33.462,50.128 U2.76@33.425,50.165 ; R14.2@47.55,75.076 47.55,71.553 46.75,70.753 ESD3.4@46.75,68.928 46.764,68.913 v1(48.306,68.913)
  Bottom Layer w0.2: v1(32.75,63.578) 32.75,52.803 33.325,52.228 v1(33.325,50.803) ; v1(48.306,63.578) v1(48.306,68.913)
SWDIO: ESD3.3 R16.2 U2.72 | length 38
  Top Layer w0.2: v1(35.25,62.228) 35.275,62.203 46.7,62.203 v1(46.725,62.178) ; ESD3.3@46.75,67.028 48.958,67.028 49.075,67.145 49.075,69.678 49.85,70.453 R16.2@49.85,75.101
  Top Layer w0.25: U2.72@36.7,51.866 v1(36.699,54.739)
  Top Layer w0.3: v1(46.725,65.753) 46.738,65.765 46.738,67.015 ESD3.3@46.75,67.028
  Bottom Layer w0.2: v1(35.25,62.228) 35.25,59.128 36.699,57.678 v1(36.699,54.739)
  Bottom Layer w0.3: v1(46.725,62.178) v1(46.725,65.753)
SWO: ESD3.1 R17.2 U2.89 | length 42.2
  Top Layer w0.2: U2.89@33.462,43.628 36.275,43.628 38.27,45.623 41.795,45.623 45.975,49.803 v1(46,49.803) ; v1(44.573,65.712) 44.573,67.109 ; R17.2@45.3,75.074 45.3,74.033 44.573,73.307 44.573,67.446 44.573,67.109 ; ESD3.1@45.45,67.028 44.655,67.028 44.573,67.109
  Bottom Layer w0.2: v1(44.573,65.712) 44.573,64.975 45.386,64.163 45.386,59.591 46,58.977 v1(46,49.803)
T_JTDI: CN4.10 R15.1 | length 3.6
  Top Layer w0.5: R15.1@43.025,77.128 43.027,77.129 43.027,78.085 43.985,79.043 CN4.10@43.985,80.308
T_NRST: CN4.12 R18.1 | length 4.1
  Top Layer w0.5: R18.1@40.8,77.13 40.975,77.13 41.225,77.38 41.225,77.555 42.715,79.045 CN4.12@42.715,80.308
T_SWCLK: CN4.6 R14.1 | length 3.6
  Top Layer w0.5: CN4.6@46.525,80.308 46.525,79.053 47.491,78.087 47.491,77.189 R14.1@47.55,77.13
T_SWDIO: CN4.4 R16.1 | length 4.8
  Top Layer w0.5: CN4.4@47.795,80.308 47.891,80.212 47.891,79.137 48.184,78.844 49.526,78.844 49.826,78.544 49.826,77.178 R16.1@49.85,77.155
T_SWO: CN4.8 R17.1 | length 3.2
  Top Layer w0.5: CN4.8@45.253,80.305 CN4.8@45.255,80.308 45.255,78.594 45.3,78.549 R17.1@45.3,77.128
T_VCP_RX: CN4.13 R19.1 | length 8.4
  Top Layer w0.5: R19.1@36.225,77.155 36.259,77.189 36.259,79.562 38.275,81.578 CN4.13@41.445,81.578
T_VCP_TX: CN4.14 R13.1 | length 5.7
  Top Layer w0.5: R13.1@38.5,77.155 38.5,79.578 39.23,80.308 CN4.14@41.445,80.308
USART1_RX: ESD2.1 R19.2 U2.69 | length 26.2
  Top Layer w0.2: v1@35.475,67.12 35.475,72.728 36.225,73.478 R19.2@36.225,75.101 ; v1(35.48,67.033) 36.295,67.033 ESD2.1@36.325,67.003 v1@35.592,67.003 ; v1(37.85,55.35) 37.85,54.078 38.2,53.728 U2.69@38.2,51.866
  Bottom Layer w0.2: v1(35.48,67.033) 35.48,64.073 37.725,61.828 37.725,57.295 37.85,57.17 v1(37.85,55.35)
USART1_TX: ESD2.5 R13.2 U2.68 | length 34
  Top Layer w0.2: v1(34.275,62.903) v1(40.325,62.903) ; ESD2.5@36.325,68.903 36.338,68.915 v1@36.338,69.99 ; v1(36.35,70.003) 36.35,71.628 38.5,73.778 R13.2@38.5,75.101 ; U2.68@38.7,51.866 v1(38.7,55.35)
  Bottom Layer w0.2: v1(34.275,62.903) 34.275,69.885 34.392,70.003 v1(36.35,70.003) ; v1(38.7,55.35) 38.655,55.395 38.655,57.633 40.325,59.303 v1@40.325,62.885
USART2_RX: CN2.6 U2.25 | length 40.7
  Top Layer w0.2: v1(14.475,37.728) 25.098,37.728 v1(25.117,37.747) ; v1(47.189,38.153) 47.189,36.4 U2.25@47.2,36.39
  Bottom Layer w0.2: CN2.6@9.73,35.678 11.002,36.95 13.697,36.95 v1(14.475,37.728) ; v1(25.117,37.747) 45.099,37.747 46.086,38.733 46.609,38.733 v1(47.189,38.153)
USART2_TX: CN2.8 U2.24 | length 39.5
  Top Layer w0.2: CN2.8@9.73,38.218 10.988,36.959 v1(25.218,36.959) ; v1(46.326,38.153) 46.33,38.153 46.7,37.783 U2.24@46.7,36.39
  Bottom Layer w0.2: v1(25.218,36.959) 45.132,36.959 v1(46.326,38.153)
USART3_RX: CN2.14 U2.56 | length 51.2
  Top Layer w0.18: CN2.14@9.73,45.838 9.702,45.838 8.47,47.07 8.47,53.688 8.854,54.072 cw(c9.73,53.458) 9.116,54.334 10.461,55.679 20.545,55.679 22.196,57.33 40.253,57.33 40.563,57.02 44.369,57.02 44.7,56.689 U2.56@44.7,51.866
USART3_TX: CN2.12 U2.55 | length 41.4
  Top Layer w0.2: v1(36.875,46.003) 41.45,46.003 45.2,49.753 U2.55@45.2,51.866
  Top Layer w0.25: CN2.12@9.73,43.423 11.125,42.028 16.2,42.028 19.025,44.853 v1(29.85,44.853)
  Bottom Layer w0.2: v1(29.85,44.853) 35.725,44.853 v1(36.875,46.003)
VBAT: BH1.POS C15.1 C16.1 U2.6 | length 169.8
  Top Layer w0.25: C15.1@31.85,32.529 C15.1@31.877,32.502 ; C16.1@34.175,32.502 35.202,32.502 37.7,35 U2.6@37.7,36.39
  Top Layer w0.75: C15.1@31.846,32.6 29.78,32.6 24.6,27.42 24.6,21.25 25.289,20.561 99.461,20.561 99.9,21.001 99.9,69.01 95.669,73.241 82.688,73.241 v1(82.47,73.459)
  Top Layer w1: C15.1@31.877,32.502 C16.1@34.175,32.502
  Bottom Layer w0.5: BH1.POS@79.625,73.278 BH1.POS@79.806,73.459
  Bottom Layer w1: BH1.POS@79.806,73.459 v1(82.47,73.459)
VDD: C8.2 CN2.3 CN4.3 | length 88.6
  Top Layer w0.5: CN2.3@12.27,33.11 11.005,34.375 8.243,34.375 7.95,34.668 7.95,71.45 15.675,79.175 C8.2@18.998,79.175 18.998,81.348 20.5,82.85 47.356,82.85 47.747,82.458 47.747,81.625 CN4.3@47.795,81.578
VDD11_1&2: C17.1 C18.1 L1.1 U2.49 U2.98 | length 46.8
  Top Layer w0.2: U2.98@33.462,39.128 37.4,39.128 38.65,40.378 38.65,44.435 38.767,44.553 46.275,44.553 46.58,44.857 v1(46.58,49.278) ; U2.49@48.938,49.628 50.175,49.628 50.644,50.096 v1(50.644,52.275) 51.931,52.275 C17.1@52.08,52.424 52.08,53.758 52.197,53.876 56.445,53.876 56.562,53.758 L1.1@56.562,51.971
  Top Layer w0.25: C18.1@28.441,37.442 29.809,37.442 31.495,39.128 U2.98@33.462,39.128
  Top Layer w0.35: C18.1@28.402,37.403 C18.1@28.441,37.442
  Bottom Layer w0.2: v1(46.58,49.278) 47.843,49.278 49.264,50.7 49.264,50.896 v1(50.644,52.275)
VREF+: CN3.3 U2.20 | length 28.1
  Top Layer w0.2: U2.20@44.7,36.39 44.7,33.728 44.85,33.578 v1(46.15,33.578) ; v1(49.325,34.303) 63.058,34.303 63.4,34.644 v1(63.4,35.5) ; CN3.3@66.021,38.483 CN3.3@66.025,38.488
  Top Layer w0.5: v1(63.8,38.5) 63.806,38.494 66.01,38.494 CN3.3@66.021,38.483
  Bottom Layer w0.2: v1(46.15,33.578) 48.6,33.578 v1(49.325,34.303)
  Bottom Layer w0.5: v1(63.4,35.5) 63.4,38.073 v1@63.8,38.473
pads on no net: CN4.1 CN4.2 CN4.9 ESD3.5 PTH1.1 PTH2.1 PTH3.1 PTH4.1 U1.17 U1.18 U1.22 U2.1 U2.2 U2.3 U2.4 U2.5 U2.12 U2.13 U2.29 U2.32 U2.34 U2.35 U2.36 U2.37 U2.42 U2.52 U2.53 U2.54 U2.57 U2.58 U2.59 U2.62 U2.63 U2.64 U2.70 U2.71 U2.81 U2.86 U2.87 U2.90

## Polygon pours and split planes (outlines as drawn)
GND on Bottom Layer "GND_L02_P000" (solid, remove dead copper, pour order 0): 1,83 105,83 105,1 1,1

## Silkscreen, mask and mechanical layers (free items; w line width, h text height)
Top Overlay:
  text "23" at 25.3,62.35 h1.25
  text "44" at 78.5,62.075 h1.25
  text "20" at 5.75,52.728 h1.25
  text "18" at 5.975,50.403 h1.25
  text "16" at 6.025,47.878 h1.25
  text "9" at 67.65,45.303 h1.25
  text "14" at 6.025,45.253 h1.25
  text "7" at 67.75,42.903 h1.25
  text "12" at 6.025,42.753 h1.25
  text "5" at 67.675,40.353 h1.25
  text "10" at 5.975,40.228 h1.25
  text "3" at 67.8,37.878 h1.25
  text "8" at 6.475,37.628 h1.25
  text "6" at 6.425,35.228 h1.25
  text "4" at 6.15,32.703 h1.25
  text "2" at 6.4,30.028 h1.25
  text "GND" at 6.95,27.478 h1.25
  text "DVDD" at 11.825,27.478 h1.25
  text "22" at 22.675,22.728 h1.25
Bottom Overlay:
  drawing of 17 lines, arcs and shapes, not listed
  text "PD1" at 9.15,69.753 h1.25
  text "PD2" at 9.15,67.252 h1.25
  text "PD3" at 9.15,64.751 h1.25
  text "LOTE 241022" at 104.775,63.65 h1.5
  text "PD4" at 9.15,62.25 h1.25
  text "FMC-320U-A1 / V1R2R1" at 104.65,58.55 h1.5
  text "20" at 7.8,52.803 h1.25
  text "18" at 7.8,50.478 h1.25
  text "16" at 7.8,47.953 h1.25
  text "14" at 7.8,45.328 h1.25
  text "12" at 7.8,42.828 h1.25
  text "10" at 7.8,40.303 h1.25
  text "8" at 7.8,37.703 h1.25
  text "6" at 7.8,35.303 h1.25
  text "4" at 7.8,32.703 h1.25
  text "2" at 7.8,30.028 h1.25
  text "DVDD" at 16.375,27.478 h1.25
  text "GND" at 10.4,27.428 h1.25
  text "DVDD" at 7.35,23.928 h1.25
  text "Esc" at 7.35,21.453 h1.25
  text "Enter" at 7.4,18.653 h1.2
  text "UP" at 7.35,16.15 h1.25
  text "Down" at 7.35,13.878 h1.25
  text "GND" at 7.35,11.228 h1.25
  text "Esc" at 30.225,9.703 h2.5
Top Courtyard (Mech15):
  lines w0.254: 111.492,1.524 112,0 ; 111.492,82.476 112,84 ; 111.746,0 112.254,0 ; 111.746,84 112.254,84 ; 112,38.801 112,0 ; 112,45.199 112,84 ; 112.508,1.524 112,0 ; 112.508,82.476 112,84
  lines w0.35: 0,0 105.975,0 105.975,83.975 0,83.975 0,0
  lines w0.508: 118.475,40.755 189.48,40.795 ; 139.475,35.025 139.475,52.025 ; 168.525,35.08 168.525,40.795 ; 189.48,35.025 118.475,35.025 118.475,52.025 ; 189.48,52.025 118.475,52.025 ; 189.585,35.025 189.585,59.025 118.475,59.025 118.475,52.025
  text "FLOWMEET S.R.L." at 134.87,53.556 h5.08
  text "Board ID" at 119.475,49.051 h2.54
  text "Software" at 141.475,49.053 h2.54
  text "Altium Designer v20.2.4" at 143.475,44.741 h3.81
  text "FMC-320U-A1" at 119.455,44.115 h3.5
  text "84mm" at 112.914,39.055 h1.52 r90
  text "Date" at 119.475,38.774 h1.91
  text "File Name" at 141.475,38.774 h1.91
  text "Engineer" at 169.795,38.613 h1.91
  text "31/10/2023" at 121.475,36.053 h2.54
  text "FMC-320U-A1.PcbDoc" at 143.475,36.053 h2.54
  text "DHS" at 171.065,35.743 h2.54
  text "Notes:" at 119.571,29.695 h2.5
  text "1) SMD diodes/LEDs mark is for CATHODE." at 122.875,25.924 h1.52
  text "2) All capacitors are ceramic with no polarity." at 122.725,23.306 h1.52

## Dimensions
106,85.675 to 0,86.45 on Top Courtyard (Mech15)

## Text inside footprints (layer, text, board x,y; h text height)
BH1: Bottom Overlay "-" at 60.75,74.302 h2 r180; Bottom Overlay "+" at 75.625,74.486 h2 r180
CN3: Top Overlay "1" at 67.975,35.378 h1.25
LCD1: Top Overlay "1" at 81.604,22.632 h1.52
LD2: Bottom Courtyard "Cathode" at 37.029,77.573 h0.3 r270
LD3: Bottom Courtyard "Cathode" at 37.029,75.338 h0.3 r270